# Altium PCB 2.PcbDoc
Units mm, origin at the board's own origin, x right, y up, seen from the top; angles counter-clockwise.
Board outline 102.59 x 68.81 mm, 2 copper layers (Top Layer, Bottom Layer); 54 components, 144 nets, 198 pads, 29 vias.
Unrouted connection lines stored in the file: 1.
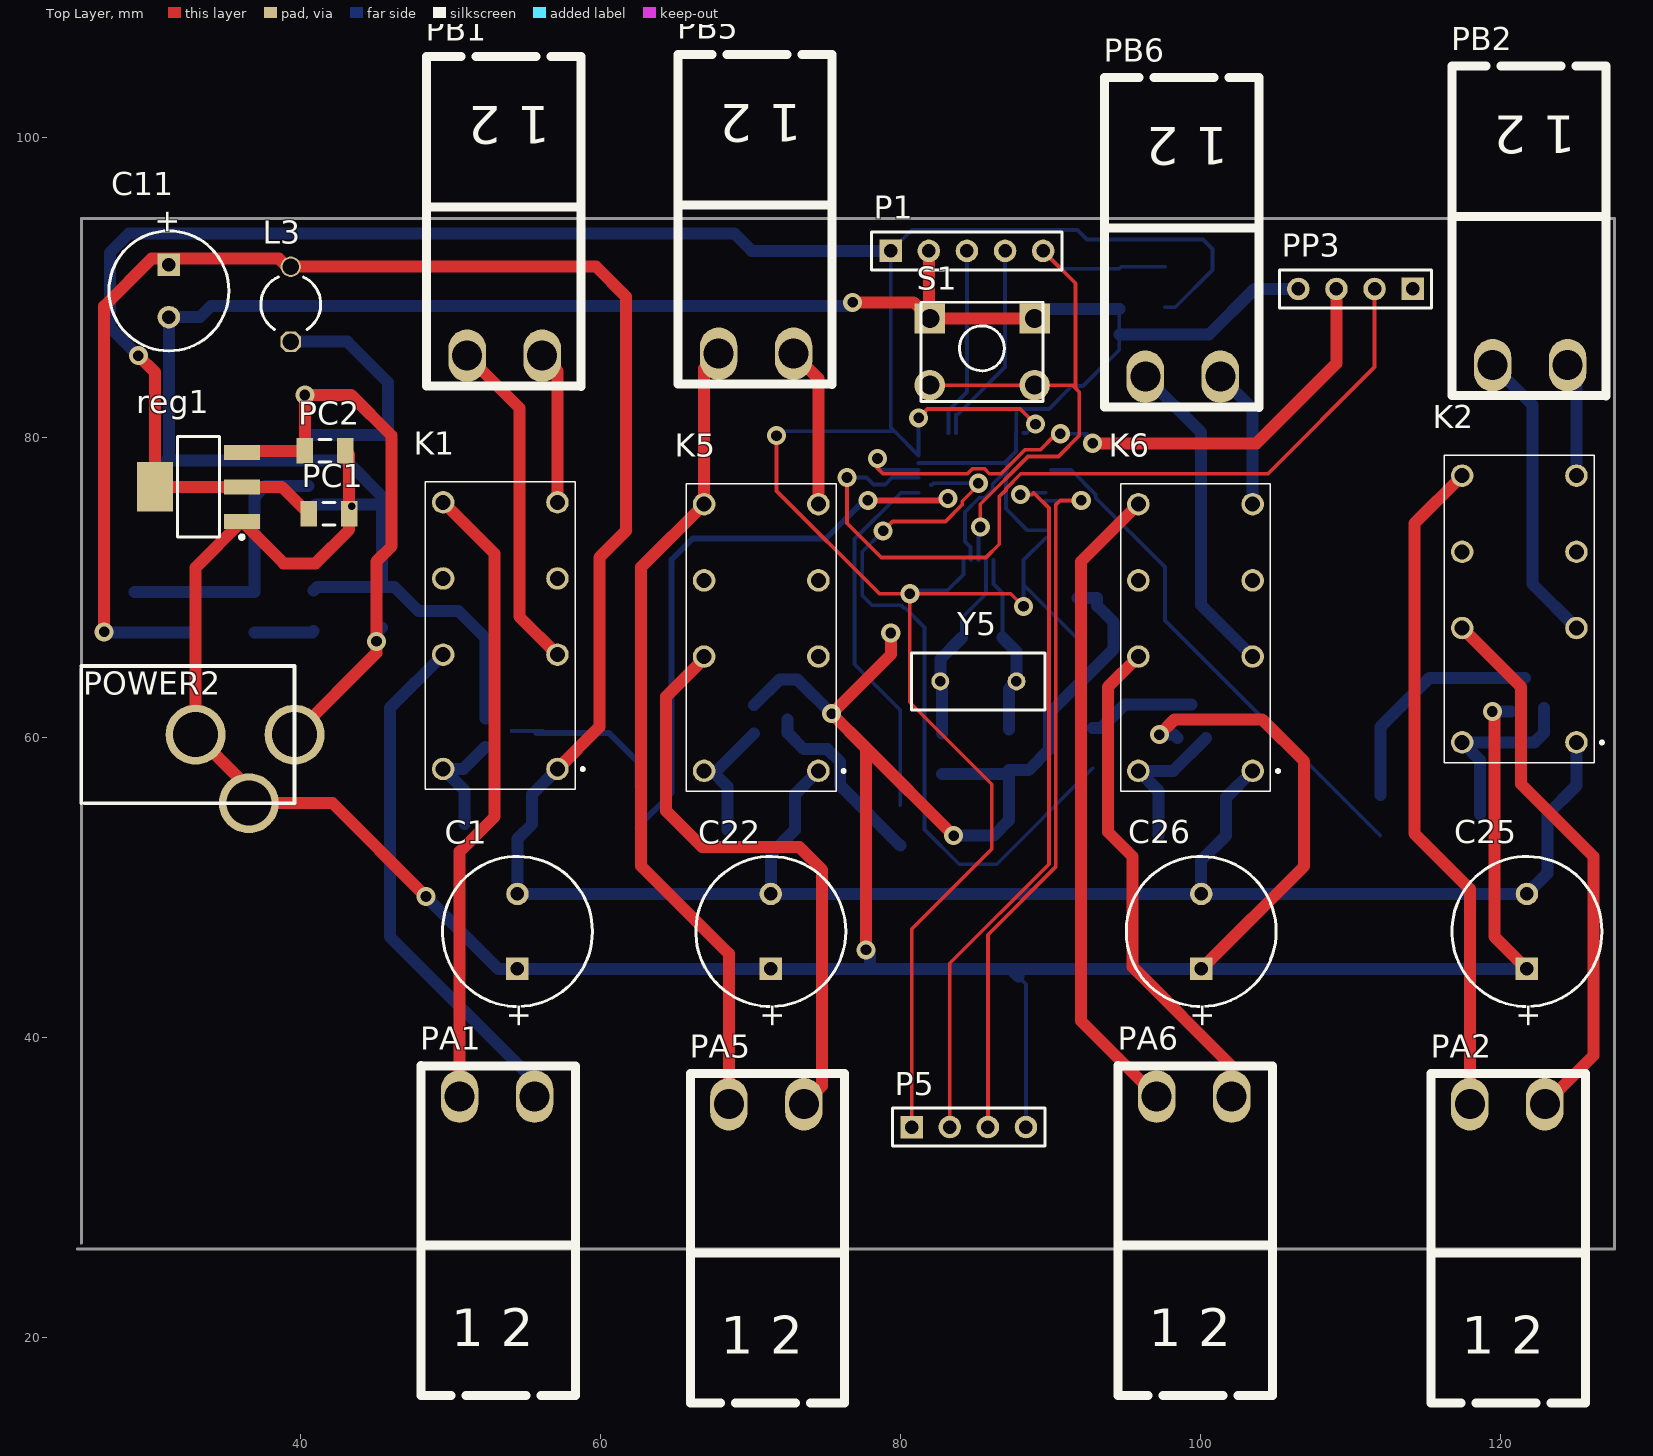
[diagram p0: Top Layer view]
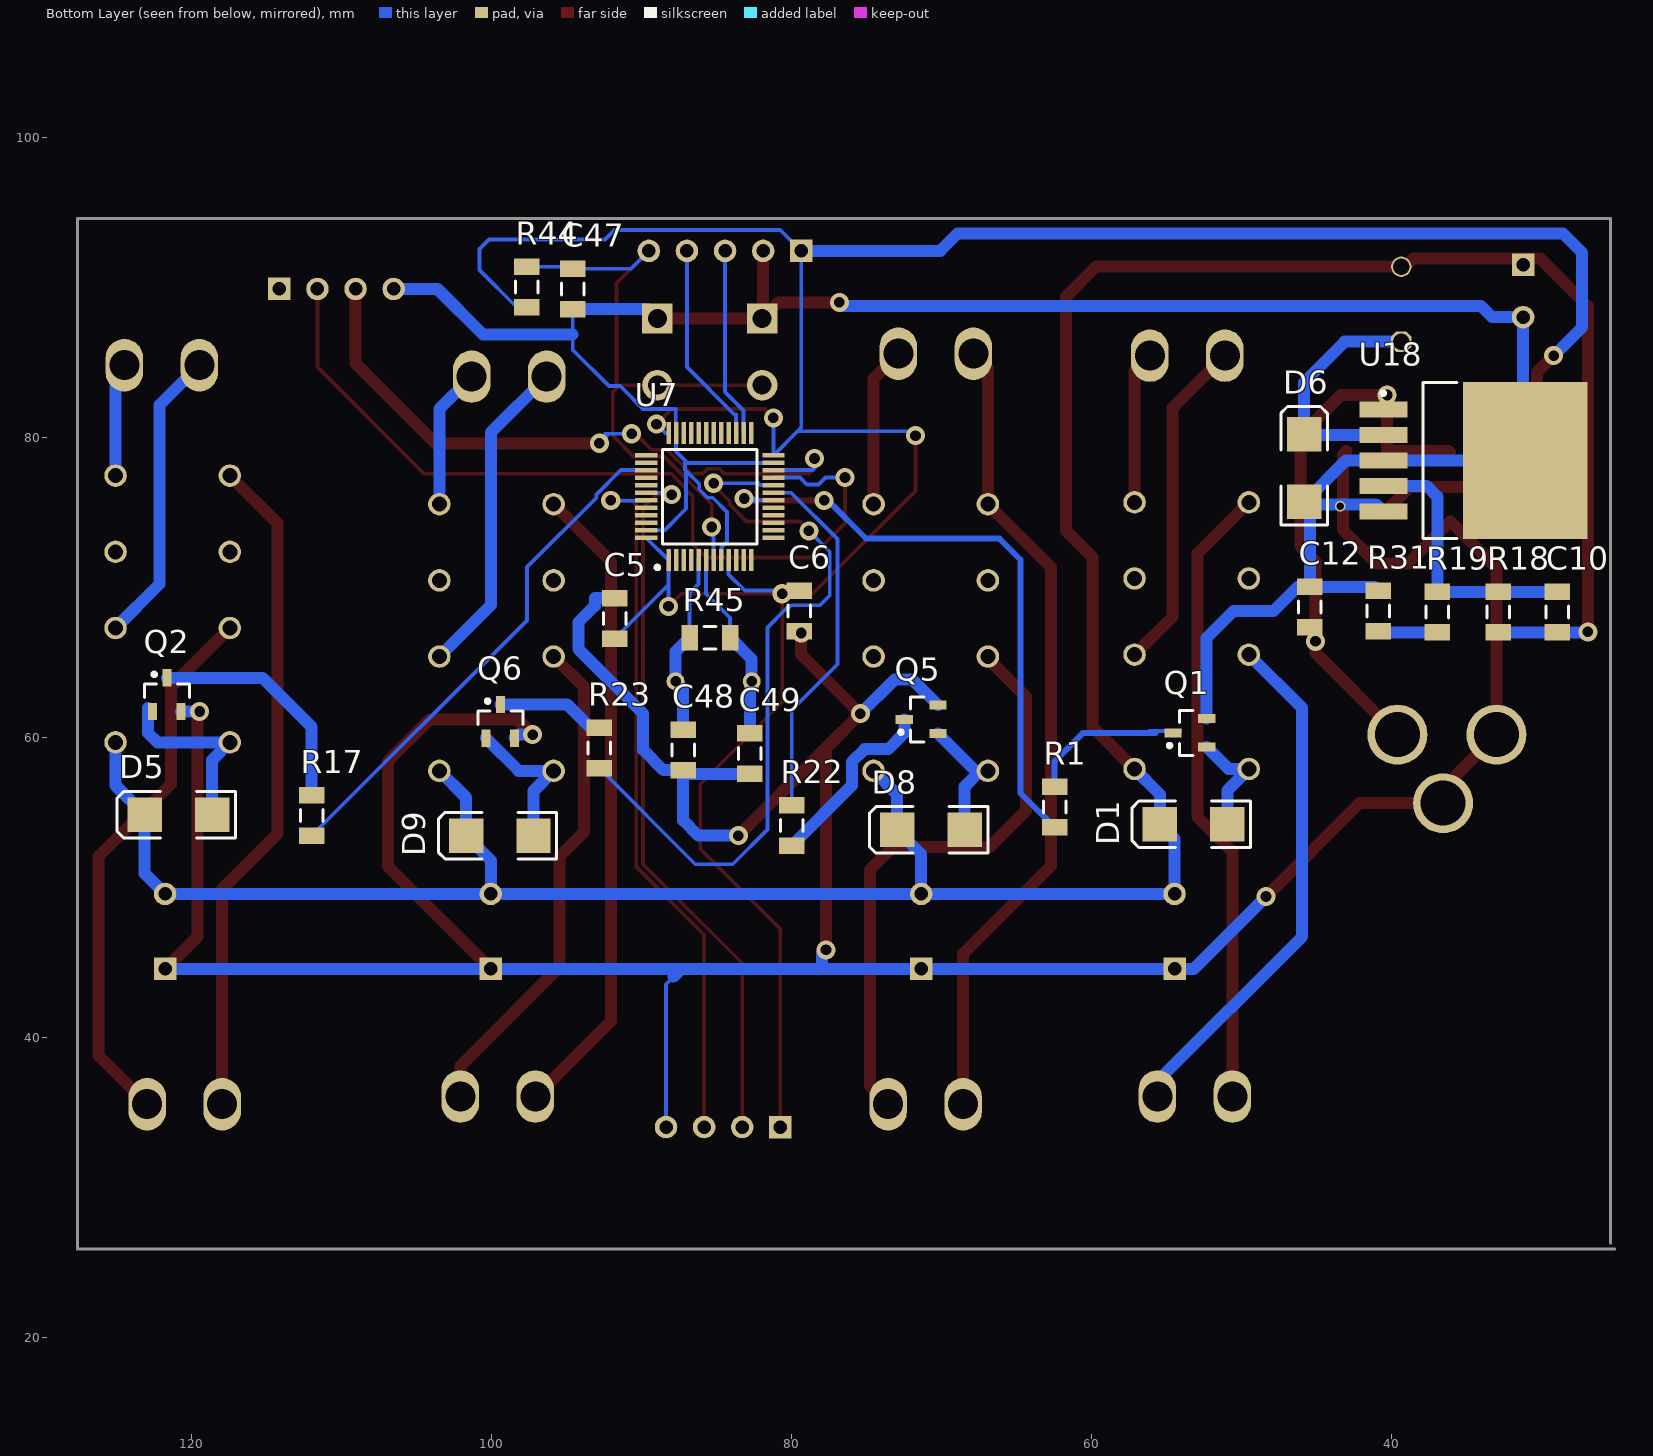
[diagram p1: Bottom Layer view, seen from below]

## Layer stack, top to bottom
Top Solder: solder mask 0.0102, Solder Resist, Dk 3.5
Top Layer: signal copper 0.0356
Dielectric 1: dielectric 0.32, FR-4, Dk 4.8
Bottom Layer: signal copper 0.0356
Bottom Solder: solder mask 0.0102, Solder Resist, Dk 3.5

## Board outline
25.146,25.858 cw(c25.146,25.908) 25.146,25.958 127.585,25.958 127.585,94.565 25.45,94.565 25.45,26.289 cw(c25.4,26.289) 25.35,26.289 25.35,94.615 cw(c25.4,94.615) 25.4,94.665 127.635,94.665 cw(c127.635,94.615) 127.685,94.615 127.685,25.908 cw(c127.635,25.908) 127.635,25.858

## Design rules (kind name [scope] priority, off if disabled: settings)
Clearance [All] p1: gap=0.2 ignorepadtopadclearanceinfootprint=FALSE
PolygonConnect [All] p1: connectstyle=Relief reliefconductorwidth=0.254 reliefentries=4 polygonreliefangle="90 Angle" airgapwidth=0.254
RoutingVias [All] p1: holewidth=0.711 width=1.27 viastyle="Through Hole" minholewidth=0.711 minwidth=1.27 maxholewidth=0.711 maxwidth=1.27
SolderMaskExpansion [All] p1: expansion=0.102
Width [All] p1: maxlimit=1 minlimit=0.254 preferedwidth=0.6
30 further rules are at their usual default settings.

## Classes and differential pairs
component class Sheet1: U1

## Components (designator, comment, footprint, x,y, rotation, side; value= is the part's Value field where it differs from the comment)
C1 "470uF" F 54.483,47.077 r90 top
C5 "100nF" 1206 91.821,67.945 r90 bottom
C6 "100nF" 1206 79.502,68.453 r270 bottom
C10 "15nF" 1206 28.956,68.373 r270 bottom
C11 "220 μF; 25 V" E 31.242,89.789 r270 top value=100uF
C12 "100nF" 1206 45.466,68.707 r90 bottom
C22 "470uF" F 71.374,47.077 r90 top
C25 "470uF" F 121.793,47.077 r90 top
C26 "470uF" F 100.076,47.077 r90 top
C47 "100nF" 1206 94.615,89.916 r270 bottom
C48 "100nF" 1206 87.249,59.182 r90 bottom
C49 "100nF" 1206 82.804,58.928 r90 bottom
D1 "SM5822" SMB 53.213,54.229 r0 bottom
D5 "SM5822" SMB 120.904,54.864 r0 bottom
D6 "SM5822" SMB 45.847,77.978 r90 bottom
D8 "SM5822" SMB 70.739,53.848 r0 bottom
D9 "SM5822" SMB 99.477,53.467 r0 bottom
K1 "HJR1-2C-L-05VDC-S-ZY" HJR12CL05VDCSZY 53.64,66.802 r90 top
K2 "HJR1-2C-L-05VDC-S-ZY" HJR12CL05VDCSZY 121.585,68.58 r90 top
K5 "HJR1-2C-L-05VDC-S-ZY" HJR12CL05VDCSZY 71.039,66.675 r90 top
K6 "HJR1-2C-L-05VDC-S-ZY" HJR12CL05VDCSZY 99.995,66.675 r90 top
L3 "68uH 3.1A (47 33)" CAPR5-4X5 39.37,88.9 r90 top value=10mH
P1 "Programmer" HDR1X5 79.375,92.456 r0 top
P5 "mu_CONNECTOR" HDR1X4 80.772,34.036 r0 top
PA1 "" "phoenix terminal R 2" 48.053,16.129 r0 top
PA2 "" "phoenix terminal R 2" 115.41,15.621 r0 top
PA5 "" "phoenix terminal R 2" 66.007,15.621 r0 top
PA6 "" "phoenix terminal R 2" 94.535,16.129 r0 top
PB1 "" "phoenix terminal R 2" 58.707,105.41 r180 top
PB2 "" "phoenix terminal R 2" 127.08,104.775 r180 top
PB5 "" "phoenix terminal R 2" 75.471,105.537 r180 top
PB6 "" "phoenix terminal R 2" 103.919,104.013 r180 top
PC1 "Cap Semi" C1206 41.91,74.93 r0 top value=22uF
PC2 "PC1" C1206 41.656,79.121 r0 top value=10uF
POWER2 "POWER" POWERIN 33.031,60.191 r90 top
PP3 "uart3_debugport" HDR1X4 114.173,89.916 r180 top
Q1 "PMBT3904" SOT23_N 53.467,60.325 r0 bottom
Q2 "PMBT3904" SOT23_N 121.666,62.865 r90 bottom
Q5 "PMBT3904" SOT23_N 71.374,61.214 r0 bottom
Q6 "PMBT3904" SOT23_N 99.441,61.087 r90 bottom
R1 "1k" C1206 62.484,55.372 r270 bottom
R17 "1k" C1206 112.014,54.817 r270 bottom
R18 "3.3k; 1%" 1206 32.893,68.373 r90 bottom
R19 "10k; 1%" 1206 36.957,68.373 r270 bottom
R22 "1k" C1206 80.01,54.149 r90 bottom
R23 "1k" C1206 92.837,59.309 r270 bottom
R31 "10k; 1%" 1206 40.894,68.453 r90 bottom
R44 "10K" 1206 97.663,90.043 r90 bottom
R45 "10K" 1206 85.471,66.675 r180 bottom
reg1 "ams1117-1.2" ams 33.274,76.708 r180 top
S1 "Switch PB" "Switch - Push to On" 85.471,85.725 r0 top
U7 "STM32F103C8T6" QFP50P900X900X160-48N 85.471,76.073 r90 bottom
U18 "LM2596S-ADJ" TS5B_N 34.565,78.486 r180 bottom
Y5 "XTAL" RAD-0.2 85.217,63.754 r0 top

## Footprints (in the part's own frame and the unit in brackets; to place one, negate y for a bottom-side part, rotate by r counter-clockwise, add the part's x,y. Pads: shape width x height; smd on the part's side, far side on the other; paste and mask are expansions set on the pad)
1206 [mm] "Chip Capacitor, Body 3.2x1.6mm, IPC High Density"
  rect 1.1x1.7 smd: 1(-1.35,0) 2(1.35,0)
  silkscreen extent -0.4,-0.75 0.4,0.75, body extent -1.7,-0.9 1.7,0.9, height 1.3
ams [mm]
  rect 2.4x1 smd: 1(-2.831,2.285) 2(-2.831,-0.015) 3(-2.831,-2.315)
  rect 2.4x3.3 smd: 4(2.969,-0.015)
  silkscreen extent -2.96,-3.36 1.47,3.46, body extent -1.78,-3.37 1.92,3.33, height 1.7
C1206 [mm] "Chip Capacitor, Body 3.2x1.6mm, IPC High Density"
  rect 1.1x1.7 smd: 1(-1.35,0) 2(1.35,0)
  silkscreen extent -0.4,-0.75 0.4,0.75, body extent -1.7,-0.9 1.7,0.9, height 1.3
CAPR5-4X5 [mm]
  oct 1.35x1.35 hole 1.1: 1(-2.5,0)
  round 1.35 hole 1.1: 2(2.5,0)
  silkscreen extent -1.69,-2 1.82,2
E [mm]
  rect 1.5x1.5 hole 0.9: 1(-1.75,0)
  round 1.5 hole 0.9: 2(1.75,0)
  silkscreen extent -4,-4 4,4
F [mm]
  rect 1.5x1.5 hole 0.9: 1(-2.5,0)
  round 1.5 hole 0.9: 2(2.5,0)
  silkscreen extent -5,-5 5,5
HDR1X4 [mm] "Connector; Header; 4 Position"
  rect 1.5x1.5 hole 0.9: 1(0,0)
  round 1.5 hole 0.9: 2(2.54,0) 3(5.08,0) 4(7.62,0)
  silkscreen extent -1.27,-1.27 8.89,1.27
HDR1X5 [mm] "Connector; Header; 5 Position"
  rect 1.5x1.5 hole 0.9: 1(0,0)
  round 1.5 hole 0.9: 2(2.54,0) 3(5.08,0) 4(7.62,0) 5(10.16,0)
  silkscreen extent -1.27,-1.27 11.43,1.27
HJR12CL05VDCSZY [mm]
  round 1.5 hole 1: 1(-8.89,-3.51) 4(-1.27,-3.51) 6(3.81,-3.51) 8(8.89,-3.51) 9(8.89,4.11) 11(3.81,4.11) 13(-1.27,4.11) 16(-8.89,4.11)
  silkscreen extent -10.25,-5.3 10.25,5.3, body extent -10.25,-4.7 10.25,5.3, height 11
"phoenix terminal R 2" [mm] "2 Right terminals"
  oval 2.5x3.5 hole 2: 1(2.573,19.939) 2(7.573,19.939)
  silkscreen extent 0,0 10.29,22
POWERIN [mm]
  round 4 hole 3: 1(0.007,-6.593) 2(0.007,0.011) 3(-4.565,-3.545)
  silkscreen extent -4.56,-6.59 4.58,7.63
QFP50P900X900X160-48N [mm]
  rect 1.475x0.3 smd: 1(-4.238,2.75) 2(-4.238,2.25) 3(-4.238,1.75) 4(-4.238,1.25) 5(-4.238,0.75) 6(-4.238,0.25) 7(-4.238,-0.25) 8(-4.238,-0.75) 9(-4.238,-1.25) 10(-4.238,-1.75) 11(-4.238,-2.25) 12(-4.238,-2.75) 25(4.238,-2.75) 26(4.238,-2.25) 27(4.238,-1.75) 28(4.238,-1.25) 29(4.238,-0.75) 30(4.238,-0.25) 31(4.238,0.25) 32(4.238,0.75) 33(4.238,1.25) 34(4.238,1.75) 35(4.238,2.25) 36(4.238,2.75)
  rect 0.3x1.475 smd: 13(-2.75,-4.238) 14(-2.25,-4.238) 15(-1.75,-4.238) 16(-1.25,-4.238) 17(-0.75,-4.238) 18(-0.25,-4.238) 19(0.25,-4.238) 20(0.75,-4.238) 21(1.25,-4.238) 22(1.75,-4.238) 23(2.25,-4.238) 24(2.75,-4.238) 37(2.75,4.238) 38(2.25,4.238) 39(1.75,4.238) 40(1.25,4.238) 41(0.75,4.238) 42(0.25,4.238) 43(-0.25,4.238) 44(-0.75,4.238) 45(-1.25,4.238) 46(-1.75,4.238) 47(-2.25,4.238) 48(-2.75,4.238)
  silkscreen extent -4.85,-3.15 3.15,3.63, body extent -4.5,-4.5 4.5,4.5, height 1.6
RAD-0.2 [mm] "Radial Cap, Thru-Hole; 2 Leads; 0.2 in Pin Spacing"
  round 1.2 hole 0.7: 1(-2.54,0) 2(2.54,0)
  silkscreen extent -4.44,-1.91 4.44,1.91
SMB [mm]
  rect 2.3x2.3 smd: 1(-2.25,0) 2(2.25,0)
  silkscreen extent -3.8,-1.55 4.1,1.55
SOT23_N [mm] "SOT23, 3-Leads, Body 2.9x1.3mm, Pitch 0.95mm, Lead Span 2.3mm - Reverse Pinning, IPC Medium Density"
  rect 1.15x0.6 smd: 1(1.125,0) 2(-1.125,-0.95) 3(-1.125,0.95)
  silkscreen extent -0.2,-1.5 1.48,1.5, body extent -0.7,-1.5 0.7,1.5, height 1.1
"Switch - Push to On" [mil]
  rect 80x80 hole 50: 1(-137.5,87.5) 1(137.5,87.5)
  round 80 hole 50: 2(-137.5,-87.5) 2(137.5,-87.5)
  silkscreen extent -160,-130 160,130, body extent -155,-121 157,123, height 205
TS5B_N [mm]
  rect 3.2x1.05 smd: 1(-6,3.4) 2(-6,1.7) 3(-6,0) 4(-6,-1.7) 5(-6,-3.4)
  rect 8.3x10.45 smd: 6(3.45,0)
  silkscreen extent -6.13,-5.2 -1.1,5.2, body extent -3.35,-5.2 6.05,5.2, height 4.65

## Part data
C1 C10 C22 C25 C26: library part Cap, "Capacitor", LatestRevisionDate=17-Jul-2002, LatestRevisionNote="Re-released for DXP Platform.", PackageDescription="Radial Cap, Thru-Hole; 2 Leads; 0.3 in Pin Spacing", PackageReference=RAD-0.3, Published=8-Jun-2000, Publisher="Altium Limited", STATE=NOT-AVAILABLE, TYPE=tantalum
C5 C6 C12 C47 C48 C49: library part Cap-Bipolar, "Bipolar Capacitor", Voltage=100V, Adding Date=1387/12/20, Designer="Saeid Jorablo", Organazation=ControTec
C11: library part 94SH107X0016EBP, "Solid Aluminum Capacitor with Organic Semiconductor Electrolyte: 100uF, 16V, Bulk Pack", ComponentLink1Description="Manufacturer Link", ComponentLink1URL=http://www.vishay.com/, ComponentLink2Description=Datasheet, ComponentLink2URL=http://www.vishay.com/docs/90006/94sh.pdf, DatasheetDocument=23-May-2001, DrillSize="Nominal, Rounded to the nearest 0.1mm", Note="Part Numbers shown are for ± 20% capacitance tolerance (X0).", PackageReference=E, PCB_Layout="Complies with Manufacturer's Recommendation.", Published=19-Mar-2004, Publisher="Altium Limited"
D1 D5 D6 D8 D9: library part "D Schottky", "Schottky Diode", Code_JEDEC=DO-214-AA, LatestRevisionDate=17-Jul-2002, LatestRevisionNote="Re-released for DXP Platform.", PackageDescription="DO-214-AA/SMB; 2 C-Bend Leads; Body 5.3 x 3.6 mm, inc. leads (LxW)", PackageReference=SMB, Published=8-Jun-2000, Publisher="Altium Limited"
K1 K2 K5 K6: "Relay or Contactor", Manufacturer_Name="TIANBO Electronics", Datasheet Link=https://www.schukat.com/schukat/pdf.nsf/index/B12244178CC2A902C125773F002B1B58/$file/2.pdf, Height=11mm, Manufacturer_Part_Number=HJR1-2C-L-05VDC-S-ZY
L3: library part Inductor, "Inductor", Code_IEC=1005, Code_JEITA=0402, LatestRevisionDate=29-May-2009, LatestRevisionNote="IPC-7351 Footprint Added.", PackageDescription="Chip Inductor", PackageReference=0402-A, Published=8-Jun-2000, Publisher="Altium Limited"
P1: library part "Header 5", "Header, 5-Pin", LatestRevisionDate=17-Jul-2002, LatestRevisionNote="Re-released for DXP Platform.", Publisher="Altium Limited"
P5 PP3: library part "Header 4", "Header, 4-Pin", LatestRevisionDate=17-Jul-2002, LatestRevisionNote="Re-released for DXP Platform.", Publisher="Altium Limited"
PA1 PA2 PA5 PA6 PB1 PB2 PB5 PB6: library part "Header 2", "Header, 2-Pin", LatestRevisionDate=17-Jul-2002, LatestRevisionNote="Re-released for DXP Platform.", Publisher="Altium Limited"
PC1: "Capacitor (Semiconductor SIM Model)", LatestRevisionDate=29-May-2009, LatestRevisionNote="IPC-7351 Footprint Added.", PackageDescription="Chip Capacitor", PackageReference=C1206, Published=8-Jun-2000, Publisher="Altium Limited"
PC2: library part "Cap Semi", "Capacitor (Semiconductor SIM Model)", LatestRevisionDate=29-May-2009, LatestRevisionNote="IPC-7351 Footprint Added.", PackageDescription="Chip Capacitor", PackageReference=C1206, Published=8-Jun-2000, Publisher="Altium Limited"
POWER2: library part PWR2.5, "Low Voltage Power Supply Connector", ComponentLink1Description="Manufacturer Link", ComponentLink1URL=http://domino.kycon.com/internet/Products.html, DatasheetDocument=09-May-2002, Published=17-Dec-2003, Publisher="Altium Limited"
Q1 Q2 Q5 Q6: "NPN Switching Transistor", ComponentLink1Description="Manufacturer Link", ComponentLink1URL=http://www.semiconductors.philips.com/, ComponentLink2Description=Datasheet, ComponentLink2URL=http://www.semiconductors.philips.com/acrobat/datasheets/PMBT3904_4.pdf, DatasheetVersion=27-Apr-1999, LatestRevisionDate=12-Dec-2006, LatestRevisionNote="IPC-7351 Footprint Added.", PackageDescription="3-Pin SOT-23 Package 0.95 mm Pitch, 2.3 mm Lead Span", PackageReference=SOT23, PackageVersion=May-1999, Published=17-Sep-2003, Publisher="Altium Limited"
R1 R17 R18 R19 R22 R23 R31 R44 R45: library part Resistor, "Resistor"
reg1: library part ams1117-3.3
S1: "Push Button Switch"
U7: "ARM Cortex-M3 32-bit MCU, 64 KB Flash, 20 KB Internal RAM, 37 I/Os, 48-pin LQFP, -40 to 85 degC, Tray", I/Os (High Current)=37, Operating Frequency(F) (Processor speed) (MHz)=72, Supplier Part Number 1=497-6063-ND, Supply Voltage(Vcc) min (V)=2, A/D Converter="2x12-bit (10 Channel)", ComponentLink1Description="Manufacturer URL", ComponentLink1URL=http://www.st.com/web/en/home.html, ComponentLink2Description=Datasheet, ComponentLink2URL=http://www.st.com/st-web-ui/static/active/en/resource/technical/document/datasheet/CD00161566.pdf, ComponentLink3Description="Package Specification", ComponentLink3URL=http://www.st.com/st-web-ui/static/active/en/resource/technical/document/datasheet/DM00058181.pdf, Core="ARM Cortex-M3", DatasheetVersion="Rev. 16", FLASH Size (Prog) (kB)=64, Internal RAM Size (kB)=20, Mounting Technology="Surface Mount", PackageDescription="48-Pin Low Profile Quad Flat Package, 7 x 7 mm Body, 0.5 mm Pitch", PackageReference=LQFP48, PackageVersion="Rev. 6, 06/2013", Packing=Tray, PartNumber=STM32F103C8T6, Supplier 1=Digi-Key, Supplier 2=Farnell, Supplier 3=Newark, Supplier 4=Newark, Supplier 5=Mouser, Supplier Part Number 2=1447637, Supplier Part Number 3=59M2182, Supplier Part Number 4=57P1222, Supplier Part Number 5=511-STM32F103C8T6
U18: "SIMPLE SWITCHER® Power Converter 150 KHz 3A Step-Down Voltage Regulator, 5-pin TO-263", Manufacturer="National Semiconductor", PackageTopMarking="NSUZXYTTE#*LM2596S*-ADJ P+", PowerWise=N, Supplier Part Number 1=1523864, Code_JEDEC=MO-169-AB, ComponentLink1Description="LM2596 Datasheet", ComponentLink1URL=http://www.national.com/ds/LM/LM2596.pdf, ComponentLink2Description="LM2596 Web Page", ComponentLink2URL=http://www.national.com/pf/LM/LM2596.html, ComponentLink3Description="TS5B Package Page", ComponentLink3URL=http://www.national.com/packaging/folders/ts5b.html, CompType=Switcher, DatasheetVersion=May-2002, PackageDescription="TO-263, Molded, .400 x .390 x .180in, 5 Lead, .067in Pitch, Surface Mount", PackageReference=TS5B, PackageVersion="revD, Apr-2005", PartNumber=LM2596S-ADJ, PinCount=5, Published=4-Dec-2008, Publisher="Altium Limited", RoHS=N, Supplier 1=Farnell, Supplier 2=Farnell, Supplier Part Number 2=9494367
Y5: "Crystal Oscillator", LatestRevisionDate=17-Jul-2002, LatestRevisionNote="Re-released for DXP Platform.", PackageDescription="Crystal, Thru-Hole; 2 Leads; Body 3.1 x 8.2 mm (Dia.xH)", PackageReference=R38, Published=8-Jun-2000, Publisher="Altium Limited"

## Via types
v1: diameter 1.27, hole 0.711, Top Layer to Bottom Layer, 28 vias
v2: diameter 0.7, hole 0.5, Top Layer to Bottom Layer, 1 vias

## Nets (pads, with @x,y where several pads share a name; then routed paths per layer and width w, separated by ;. In a path a pad name is that pad's centre, name@x,y a point inside that pad or via, vN(x,y) a via of type N, cw(c..) or ccw(c..) an arc to the next point about the centre after c; other vN are vias at no path point)
1.1V: 
3.3V: C5.1 C6.1 P1.1 P5.1 PC1.1 PP3.1 R44.1 reg1.2 reg1.4 U7.1 U7.9 U7.24 U7.36 U7.48 | length 222.3
  Top Layer w0.254: v1(71.755,80.137) 71.755,76.454 78.613,69.596 v1(80.645,69.596) ; P5.1 80.772,47.244 86.106,52.578 86.106,56.896 80.645,62.357 v1(80.645,69.596) ; v1(81.233,81.327) 81.821,81.915 88.011,81.915 v1(89.027,80.899) ; v1(88.221,68.751) 87.376,69.596 v1(80.645,69.596)
  Top Layer w0.8: v1(29.21,85.471) 30.305,84.376 reg1.4 reg1.2 38.767,76.723 PC1.1
  Bottom Layer w0.254: v1(71.755,80.137) 72.045,80.427 79.629,80.427 ; v1@80.518,69.723 v1(80.645,69.596) ; v1@80.645,69.803 83.138,69.803 84.221,70.886 U7.9 ; v1(81.233,81.327) U7.24 79.629,80.427 ; v1(88.221,68.751) 88.221,70.195 ; U7.36 88.439,80.311 v1(89.027,80.899) ; U7.48 U7.1 88.221,70.195 ; C5.1 88.221,70.195 ; R44.1 98.345,88.693 100.838,91.186 100.838,92.583 100.203,93.218 92.456,93.218 91.821,93.853 80.772,93.853 P1.1 79.375,80.681 79.629,80.427
  Bottom Layer w0.8: v1(29.21,85.471) 27.305,87.376 27.305,92.329 28.575,93.599 68.961,93.599 70.104,92.456 P1.1
5V: C1.2 C10.2 C11.1 C22.2 C25.2 C26.2 D1.2 D5.2 D8.2 D9.2 K1.1 K2.1 K5.1 K6.1 L3.2 R18.1 | length 205.6
  Top Layer w0.8: v1(26.924,67.056) 26.924,88.773 30.099,91.948 38.58,91.948 L3.2@39.243,91.285 ; L3.2 59.73,91.4 61.722,89.408 61.722,73.787 59.944,72.009 59.944,60.706 K1.1
  Bottom Layer w0.8: v1(26.924,67.056) 26.957,67.023 C10.2 R18.1 ; K1.1 55.463,56.225 D1.2 54.483,53.249 C1.2 C22.2@71.374,49.577 ; K5.1 72.989,56.225 D8.2 71.374,52.233 C22.2@71.374,49.577 ; K6.1 101.727,56.007 D9.2 100.076,51.816 C26.2@100.076,49.577 ; K2.1 125.095,56.805 D5.2 123.154,50.938 C25.2 C26.2@100.076,49.577 ; C22.2@71.374,49.577 C26.2@100.076,49.577
12V: C12.1 PC2.1 POWER2.1 reg1.3 U18.1 | length 39.7
  Top Layer w0.8: reg1.3 36.203,79.121 PC2.1 v1(40.306,82.851) 43.387,82.851 46.101,80.137 46.101,72.771 45.085,71.755 v1(45.085,66.421) 45.085,65.659 POWER2.1
  Bottom Layer w0.8: v1(40.306,82.851) 40.306,82.145 U18.1 ; v1(45.085,66.421) 45.085,66.976 C12.1
ADO: 
CLK: 
CS: 
DATA_humadity: 
GND: C1.1 C5.2 C6.2 C11.2 C12.2 C22.1 C25.1 C26.1 C47.2 C48.1 C49.1 D6.1 P1.2 P5.4 PC1.2 PC2.2 POWER2.2 POWER2.3 PP3.4 Q1.2 Q2.2 Q5.2 Q6.2 R31.2 reg1.1 S1.1 U7.8 U7.23 U7.35 U7.47 U18.3 U18.5 U18.6 | length 426.4
  Top Layer w0.8: PC2.2 43.26,78.867 PC1.2 43.26,73.867 41.021,71.628 38.9,71.628 reg1.1 33.02,71.338 POWER2.2 36.576,56.642 POWER2.3 42.164,55.626 v1(48.387,49.403) ; v1(76.835,89.027) 80.899,89.027 S1.1@81.915,88.011 ; v1(77.724,45.847) 77.724,59.309 ; v1(79.375,66.976) 79.375,65.532 v1(75.438,61.595) 77.724,59.309 ; P1.2 S1.1@81.915,88.011 ; v1(83.566,53.467) 77.724,59.309 ; S1.1@88.963,87.947 81.978,87.947 S1.1@81.915,88.011 ; v1(97.282,60.198) 98.298,61.214 104.14,61.214 106.934,58.42 106.934,51.435 C26.1 ; v1(119.489,61.74) 119.634,61.595 119.634,46.736 C25.1
  Bottom Layer w0.255: U7.23 86.959,78.323 87.122,78.486 ; U7.8 84.698,71.858 84.698,72.708 84.328,73.078 84.328,75.057 85.271,76 85.616,76 86.179,76.563 86.179,76.908 87.049,77.778 ; 87.884,44.069 88.392,43.561 P5.4 ; U7.47 88.483,73.823 87.049,75.257 87.049,77.778 ; C47.2 94.615,86.868 94.615,85.852 92.202,83.439 91.44,83.439 89.916,81.915 87.744,81.915 87.744,80.311 U7.35 87.721,79.085 87.122,78.486 ; 87.049,77.778 87.122,77.851 87.122,78.486
  Bottom Layer w0.8: U18.5 41.04,75.561 45.68,75.561 45.466,75.347 C12.2 ; R31.2 41.148,70.057 C12.2 ; D6.1 45.811,75.728 43.053,78.486 U18.3 U18.6 31.242,78.613 C11.2 33.302,88.039 34.036,88.773 76.581,88.773 v1(76.835,89.027) ; v1(48.387,49.403) 53.213,44.577 C1.1 77.978,44.577 ; Q1.2 52.342,66.657 50.546,68.453 47.879,68.453 46.275,70.057 C12.2 ; Q5.2 71.966,63.881 73.152,63.881 v1(75.438,61.595) ; v1(77.724,45.847) 77.978,45.593 77.978,44.577 ; v1(79.375,66.976) C6.2 ; C49.1 86.995,57.578 C48.1 ; v1(83.566,53.467) 86.233,53.467 87.249,54.483 C48.1 ; 87.884,44.069 87.376,44.577 ; S1.1@88.963,87.947 89.582,88.566 C47.2 ; C5.2 93.138,69.295 93.138,68.787 94.234,67.691 94.234,65.913 89.916,61.595 89.916,59.182 88.566,57.832 C48.1 ; 94.615,86.868 100.584,86.868 103.632,89.916 PP3.4 ; v1(97.282,60.198) 98.255,60.198 Q6.2 ; v1(119.489,61.74) Q2.2 ; C25.1 87.376,44.577 ; 77.978,44.577 87.376,44.577
  other v2: 43.434,75.438
GPS_rx: 
GPS_tx: 
INT: 
"inveting 1": 
"inveting 2": 
"inveting 4": 
MICRO_RX3: 
MICRO_TX3: 
MISO2: 
MOSI2: 
NC: 
NetC1_1: 
NetC5_2: 
NetC6_2: 
NetC7_1: 
NetC10_1: C10.1 R18.2 R19.1 U18.4 | length 18.3
  Bottom Layer w0.8: C10.1 R19.1 36.957,76.073 37.67,76.786 U18.4
NetC16_2: 
NetC17_2: 
NetC18_2: 
NetC19_2: 
NetC45_2: U7.3
NetC46_2: U7.4
NetC48_2: C48.2 R45.1 U7.5 Y5.2 | length 12.1
  Bottom Layer w0.254: U7.5 86.221,70.243 86.821,69.643 R45.1
  Bottom Layer w0.8: R45.1 87.757,65.739 Y5.2 87.249,63.246 C48.2
NetC49_2: C49.2 R45.2 U7.6 Y5.1 | length 12.9
  Bottom Layer w0.254: R45.2 84.121,67.992 85.721,69.592 U7.6
  Bottom Layer w0.8: C49.2 82.804,63.627 Y5.1 82.677,65.231 R45.2
NetD1_1: D1.1 K1.16 Q1.3 | length 7.7
  Bottom Layer w0.8: D1.1 50.963,56.479 K1.16 50.879,57.912 Q1.3
NetD1_2: 
NetD2_1: 
NetD3_2: 
NetD4_2: 
NetD5_1: D5.1 K2.16 Q2.3 | length 12.7
  Bottom Layer w0.8: D5.1 118.654,58.511 K2.16 122.301,59.69 122.936,60.325 122.936,61.976
NetD6_2: D6.2 L3.1 U18.2 | length 16.4
  Bottom Layer w0.8: L3.1 43.14,86.4 45.847,83.693 D6.2 45.805,80.186 U18.2
NetD8_1: D8.1 K5.16 Q5.3 | length 9.1
  Bottom Layer w0.8: K5.16@67.183,57.531 K5.16 K5.16@67.437,57.785 ; D8.1 68.489,56.733 K5.16@67.437,57.785 ; Q5.3 67.77,57.785 K5.16@67.437,57.785
NetD9_1: D9.1 K6.16 Q6.3 | length 10.3
  Bottom Layer w0.8: D9.1 97.227,56.443 K6.16 98.214,57.785 Q6.3
NetGD1_1: 
NetGD1_3: 
NetGD1_4: 
NetGQ1_1: 
NetJ2_1: 
NetK1_4: K1.4 PB1.2 | length 22.4
  Top Layer w0.8: PB1.2 54.61,81.995 54.61,68.072 K1.4
NetK1_8: K1.8 PB1.1 | length 10.2
  Top Layer w0.8: PB1.1 57.15,84.455 K1.8
NetK1_9: K1.9 PA1.1 | length 42
  Top Layer w0.8: K1.9 52.959,72.263 52.959,54.737 50.626,52.404 PA1.1
NetK1_13: K1.13 PA1.2 | length 34.9
  Bottom Layer w0.8: K1.13 45.974,61.976 45.974,46.736 55.626,37.084 PA1.2
NetK2_4: K2.4 PB2.2 | length 19.8
  Bottom Layer w0.8: PB2.2 122.174,82.169 122.174,70.231 K2.4
NetK2_8: K2.8 PB2.1 | length 7.6
  Bottom Layer w0.8: PB2.1 125.095,84.248 K2.8
NetK2_9: K2.9 PA2.1 | length 44.8
  Top Layer w0.8: K2.9 114.3,74.295 114.3,53.594 117.983,49.911 PA2.1
NetK2_13: K2.13 PA2.2 | length 36.7
  Top Layer w0.8: K2.13 121.412,63.373 121.412,56.896 126.238,52.07 126.238,38.815 PA2.2
NetK5_8: K5.8 PB5.1 | length 10.7
  Top Layer w0.8: PB5.1 74.549,83.947 K5.8
NetK5_9: K5.9 PA5.1 PB5.2 | length 54.6
  Top Layer w0.8: PB5.2 66.929,84.629 K5.9 62.738,71.374 62.738,51.435 68.58,45.593 PA5.1
NetK5_13: K5.13 PA5.2 | length 39.5
  Top Layer w0.8: K5.13 66.929,65.278 64.389,62.738 64.389,55.118 66.802,52.705 73.279,52.705 74.803,51.181 74.803,36.783 PA5.2
NetK6_4: K6.4 PB6.2 | length 21.6
  Bottom Layer w0.8: PB6.2 100.076,80.344 100.076,68.834 K6.4
NetK6_8: K6.8 PB6.1 | length 9.4
  Bottom Layer w0.8: PB6.1 103.505,81.915 K6.8
NetK6_9: K6.9 PA6.1 | length 43.2
  Top Layer w0.8: K6.9 92.075,71.755 92.075,41.101 PA6.1
NetK6_13: K6.13 PA6.2 | length 33.6
  Top Layer w0.8: K6.13 93.853,63.373 93.853,53.721 95.504,52.07 95.504,44.704 102.108,38.1 PA6.2
NetQ1_1: 
NetQ2_1: Q2.1 R17.1 | length 15.6
  Bottom Layer w0.8: R17.1 112.014,60.706 115.298,63.99 Q2.1
NetQ5_1: Q5.1 R22.1 | length 12.4
  Bottom Layer w0.8: Q5.1 72.499,60.31 73.574,59.235 75.15,59.235 75.999,58.386 75.999,56.81 R22.1
NetQ6_1: Q6.1 R23.1 | length 7.2
  Bottom Layer w0.8: R23.1 93.425,60.659 94.978,62.212 Q6.1
NetQ7_B: 
NetQ7_E: 
NetR4_1: 
NetR5_2: 
NetR12_2: 
NetR19_2: R19.2 R31.1 | length 4
  Bottom Layer w0.8: R19.2 40.814,67.023 R31.1
NetR20_2: 
NetR25_2: 
NetR29_1: 
Netu5_3: 
"non 1": 
"non 2": 
NRST: 
NT: 
out1: 
out3: 
out4: 
PIR_DATA: 
PWRCONTROL: 
PWRKEY: 
RELAY1: R1.2 U7.18 | length 40.9
  Top Layer w0.4: v1(77.851,75.819) 83.058,75.819 v1(83.185,75.946)
  Bottom Layer w0.254: U7.18 82.55,75.823
  Bottom Layer w0.4: R1.2 64.77,56.308 64.77,71.882 66.167,73.279 75.057,73.279 77.597,75.819 v1(77.851,75.819) ; 82.55,75.823 82.673,75.946 v1(83.185,75.946)
RELAY2: R22.2 U7.19 | length 24.6
  Bottom Layer w0.254: R22.2 80.01,61.849 76.962,64.897 76.962,73.242 80.043,76.323 U7.19
RELAY3: R23.2 U7.20 | length 49.5
  Top Layer w0.254: v1(78.867,73.787) 79.502,74.422 83.021,74.422 84.147,75.548 84.147,75.765 85.344,76.962 v1(85.217,76.962)
  Bottom Layer w0.254: v1(78.867,73.787) 77.47,72.39 77.47,69.469 78.105,68.834 80.047,68.834 80.247,68.634 80.337,68.634 81.627,67.344 81.627,53.882 83.947,51.562 86.44,51.562 R23.2 ; 82.042,76.835 82.053,76.846 82.106,76.846 82.222,76.962 v1(85.217,76.962)
RELAY4: R17.2 U7.39 | length 34.3
  Bottom Layer w0.254: U7.39@90.043,77.846 91.408,77.846 93.037,76.217 93.037,76 97.663,71.374 97.663,67.818 R17.2
RELAY5: U7.40
RELAY6: U7.41
RELAY7: U7.45
RELAY8: U7.46
RELAY9: PP3.2 U7.21 | length 56.7
  Top Layer w0.254: v1(76.454,77.343) 76.454,74.295 78.74,72.009 85.725,72.009 86.614,72.898 86.614,76.073 87.049,76.508 87.049,76.598 88.048,77.597 104.521,77.597 111.633,84.709 PP3.2
  Bottom Layer w0.254: v1(76.454,77.343) 77.761,77.343 78.215,76.889 79.011,76.889 79.465,77.343 81.213,77.343 U7.21
RELAY10: PP3.3 U7.22 | length 43.9
  Top Layer w0.254: v1(78.486,78.613) 78.486,77.978 78.867,77.597 84.492,77.597 84.819,77.924 85.615,77.924 85.942,77.597 86.734,77.597 88.331,79.194 89.354,79.194 90.297,80.137 90.551,80.137 v1(90.678,80.264)
  Top Layer w0.8: v1(92.837,79.629) 103.759,79.629 109.093,84.963 PP3.3
  Bottom Layer w0.254: v1(78.486,78.613) 78.486,77.978 78.618,77.846 81.21,77.846 U7.22 ; v1(90.678,80.264) 92.456,80.264 92.329,80.137 v1(92.837,79.629)
RELAY11: U7.25
RELAY12: U7.28
RELAY13: U7.10
RELAY14: U7.11
RELAY15: U7.14
RELAY16: U7.29
RELAY17: U7.30
RELAY18: U7.31
RELAY19: U7.32
RELAY20: U7.33
RELAY21: U7.34
RELAY22: U7.37
RELAY23: U7.38
RELAY24: U7.2
RST: 
RX1: 
RX3: 
SCK_SPI: 
SCK_SPI2: 
SCL: P5.2 U7.42 | length 48.1
  Top Layer w0.254: P5.2 83.312,44.958 89.916,51.562 89.916,75.311 88.9,76.327 88.773,76.2 v1(88.011,76.2)
  Bottom Layer w0.254: v1(88.011,76.2) 88.134,76.323 U7.42
SDA: P5.3 U7.43 | length 47.6
  Top Layer w0.254: P5.3 85.852,46.856 90.37,51.374 90.37,75.511 90.678,75.819 v1(92.075,75.819)
  Bottom Layer w0.254: U7.43 89.732,75.8 92.056,75.8 v1(92.075,75.819)
SI: 
SIM_CLK: 
SIM_DATA: 
SIM_RST: 
SIM_VDD: 
SO: 
STATUS: 
SWCLK: 
SWDIO: 
temp_data: 
TX1: 
TX3: 
U2_NRST: C47.1 P1.5 R44.2 S1.2 U7.7 | length 44.1
  Top Layer w0.254: S1.2@81.978,83.502 88.963,83.502 91.504,83.502 91.694,83.312 ; v1(85.344,74.041) 85.344,75.565 88.519,78.74 90.551,78.74 91.948,80.137 91.948,83.058 91.694,83.312 ; P1.5 91.694,90.297 91.694,83.312
  Bottom Layer w0.254: U7.7 85.221,73.918 v1(85.344,74.041) ; P1.5 90.725,91.266 C47.1 94.742,91.393 R44.2
U2_RX2: U7.13
U2_SCK: U7.15
U2_SI: U7.17
U2_SO: U7.16
U2_SWCLK: P1.4 U7.27 | length 13.5
  Bottom Layer w0.254: U7.27 83.721,81.562 ; 83.775,81.508 83.829,81.562 83.848,81.562 86.995,84.709 P1.4
U2_SWDIO: P1.3 U7.26 | length 12.7
  Bottom Layer w0.254: U7.26 83.221,81.534 83.221,81.824 84.455,83.058 P1.3
U2_TX2: U7.12
V3.3: 
V12: 
VBAT: 
VCC: 
WOL: 
XCL: 
XDA: 
pads on no net: K1.6 K1.11 K2.6 K2.11 K5.4 K5.6 K5.11 K6.6 K6.11 Q1.1 R1.1 U7.44
copper on no net: | length 9.2
  Bottom Layer w0.4: 55.753,60.325 56.261,60.325 60.579,60.325 62.484,58.42 62.484,56.722

## Keep-outs
Keep-Out Layer:
  lines w0.1: 25.146,25.908 127.635,25.908 127.635,94.615 25.4,94.615 25.4,26.289

## Other copper
Bottom Layer:
  rectangle: 53.975,60.325 56.261,60.579

## Text inside footprints (layer, text, board x,y; h text height)
C1: Top Overlay "+" at 55.233,40.602 h1.5 r90
C11: Top Overlay "+" at 30.492,95.264 h1.5 r270
C22: Top Overlay "+" at 72.124,40.602 h1.5 r90
C25: Top Overlay "+" at 122.543,40.602 h1.5 r90
C26: Top Overlay "+" at 100.826,40.602 h1.5 r90
PA1: Top Overlay "1 2" at 50.085,19.431 h2.5
PA2: Top Overlay "1 2" at 117.442,18.923 h2.5
PA5: Top Overlay "1 2" at 68.039,18.923 h2.5
PA6: Top Overlay "1 2" at 96.567,19.431 h2.5
PB1: Top Overlay "1 2" at 56.675,102.108 h2.5 r180
PB2: Top Overlay "1 2" at 125.048,101.473 h2.5 r180
PB5: Top Overlay "1 2" at 73.439,102.235 h2.5 r180
PB6: Top Overlay "1 2" at 101.887,100.711 h2.5 r180